# Altium PCB 175-00003, rev 2, Sinistro ASP.PcbDoc (part 3 of 5)
Units mil, origin at the board's own origin, x right, y up, seen from the top; angles counter-clockwise.
Board outline 5905.51 x 4330.71 mil, 8 copper layers (Top Layer (.GTL), MidLayer1 (.G1), +28V and VCC (.GP1), A and D grounds (.GP2), Earth GND (.GP3), +5ANA (.GP4), -5ANA (.GP5), Bottom Layer (.GBL)); 381 components, 275 nets, 1751 pads, 519 vias.
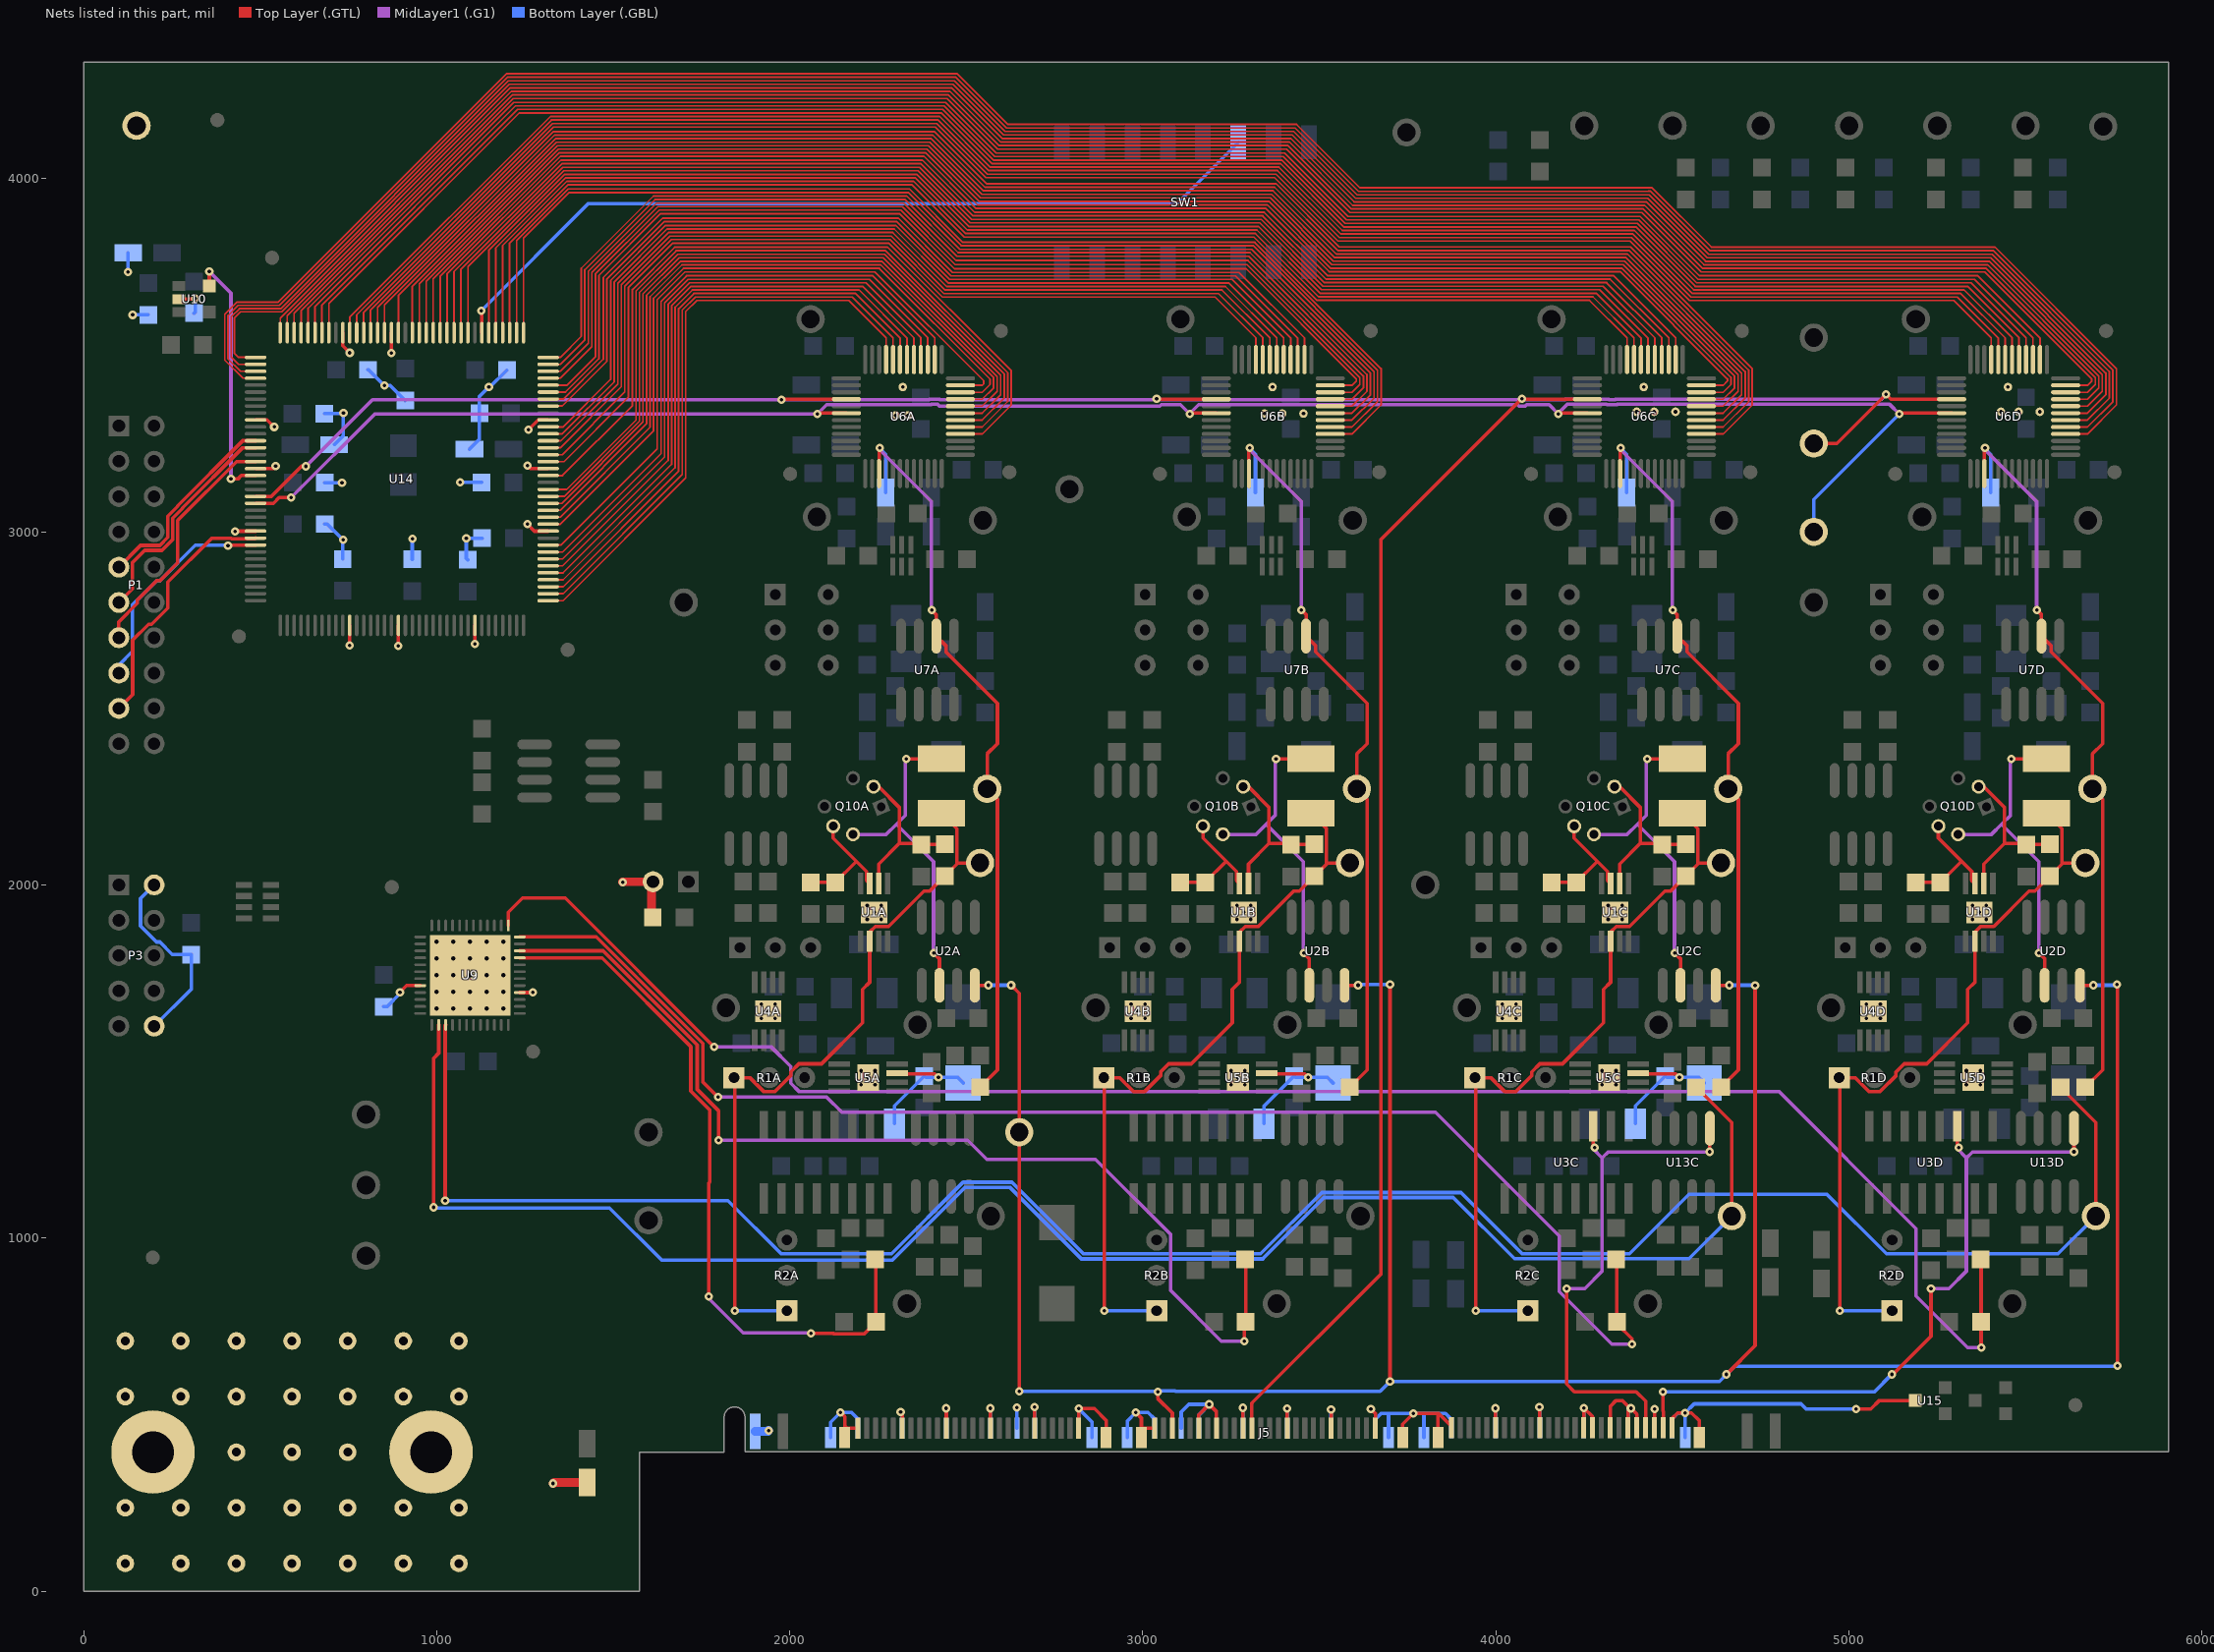
[diagram p9: the nets of this part, all layers, seen from the top]

## Via types
v1: diameter 24, hole 10, Top Layer (.GTL) to Bottom Layer (.GBL), tented both sides, 519 vias

## Nets (pads, with @x,y where several pads share a name; then routed paths per layer and width w, separated by ;. In a path a pad name is that pad's centre, name@x,y a point inside that pad or via, vN(x,y) a via of type N, cw(c..) or ccw(c..) an arc to the next point about the centre after c; other vN are vias at no path point) (continued)
CH3_BIAS_ADJ: R6C.2 TP2C.1 U9.14 | length 5032.3
  Top Layer (.GTL) w10: v1(991,1087) 991,1509 1005.91,1523.91 U9.14@1005.91,1603.74 ; R6C.2@4567.52,1427.32 4667.52,1327.32 TP2C.1@4667.52,1062.32
  Bottom Layer (.GBL) w10: v1(991,1087) 993,1085 1490,1085 1637,938 2290.8,938 2496.8,1144 2623.2,1144 2826.2,941 3340.85,941 ; 3339.52,941.32 3513.2,1115 3879,1115 4052.68,941.32 4546.52,941.32 TP2C.1@4667.52,1062.32
CH3_OUT: J5.7 U3C.3 U13C.1 | length 1514.5
  Top Layer (.GTL) w10: v1(4200.52,857.32) 4200.52,586.48 4222,565 4397,565 4423.91,538.09 J5.7@4423.91,462.85 ; U3C.3@4275.52,1316.68 4275.52,1253.32 4278.1,1255.9 v1(4279.52,1255.9) ; v1(4605.52,1244.32) U13C.1@4605.52,1310.78
  MidLayer1 (.G1) w10: v1@4199.79,857.05 4251.79,857.05 4300.79,906.05 4300.79,1227.05 ; v1@4274.79,1253.05 4300.79,1227.05 ; v1@4604.79,1244.05 4317.79,1244.05 4300.79,1227.05
CH4_BIAS_ADJ: R6D.2 TP2D.1 U9.15 | length 6138.1
  Top Layer (.GTL) w10: v1(1024,1106) 1024,1602.15 U9.15@1025.59,1603.74 ; R6D.2@5599.02,1427.32 5699.02,1327.32 TP2D.1@5699.02,1062.32
  Bottom Layer (.GBL) w10: v1(1024,1106) 1825.26,1106 1975.94,955.32 2288.32,955.32 2491,1158 2629,1158 2831.68,955.32 3333.73,955.32 3507.4,1129 3900.69,1129 4074.37,955.32 4378.32,955.32 4547,1124 4937.18,1124 5105.86,955.32 5592.02,955.32 TP2D.1@5699.02,1062.32
CH4_OUT: J5.3 U3D.3 U13D.1 | length 1986.7
  Top Layer (.GTL) w10: v1(4473,565) 4473,509.81 4473.91,508.91 J5.3@4473.91,462.85 ; v1@5122,612 5232.02,722.02 v1(5232.02,857.32) ; U3D.3@5307.02,1316.68 5307.02,1253.32 5309.6,1255.9 v1(5311.01,1255.9) ; v1(5637.02,1244.32) U13D.1@5637.02,1310.78
  MidLayer1 (.G1) w10: v1@5231.28,857.05 5283.28,857.05 5332.28,906.05 5332.28,1227.05 ; v1@5306.28,1253.05 5332.28,1227.05 ; v1@5636.28,1244.05 5349.28,1244.05 5332.28,1227.05
  Bottom Layer (.GBL) w10: v1(4473,565) 4493,565 5072,565 v1(5121,614)
CLK_100: U10.5 U14.18 | length 731.9
  Top Layer (.GTL) w10: U10.5@356.15,3696.25 v1(356.15,3737.25) ; v1@417.32,3153.54 v1(417.32,3149.61) 437.01,3149.61 446.85,3159.45 U14.18@487.21,3159.45
  MidLayer1 (.G1) w10: v1(356.15,3737.25) 417.32,3676.08 v1(417.32,3149.61)
CLK_ENBL: P1.15 U14.28 | length 630.7
  Top Layer (.GTL) w10: v1(409,2961) 410.6,2962.6 U14.28@487.21,2962.6
  Bottom Layer (.GBL) w10: P1.15@100,2600 100,2622.94 138.53,2661.47 138.53,2793.01 206.99,2861.47 215.96,2861.47 316.49,2962 410,2962 v1(409,2961)
COMMOUTA: C48A.1 R7A.2 TP9A.1 U6A.3 U7A.2 | length 2194.7
  Top Layer (.GTL) w10: U6A.3@2253.2,3164.9 v1@2253.2,3235.42 ; v1(2402.09,2778.32) 2415.09,2765.32 U7A.2@2415.09,2704.78 2442.31,2677.56 2442.31,2659.91 2588.09,2514.13 2588.09,2400.32 2559.09,2371.32 TP9A.1@2559.09,2272.32 2588.09,2243.32 2588.09,1476.32 R7A.2@2539.09,1427.32
  MidLayer1 (.G1) w10: v1@2252.46,3235.16 2401.36,3086.26 v1@2401.36,2778.05
  Bottom Layer (.GBL) w10: v1@2254.36,3237.05 2271.36,3220.05 C48A.1@2271.36,3111.05
  other v1: 2255.09,3237.32
COMMOUTB: C48B.1 R7B.2 TP9B.1 U6B.3 U7B.2 | length 2194.7
  Top Layer (.GTL) w10: U6B.3@3300.44,3164.9 v1@3300.44,3235.42 ; v1(3449.34,2778.32) 3462.34,2765.32 U7B.2@3462.34,2704.78 3489.56,2677.56 3489.56,2659.91 3635.34,2514.13 3635.34,2400.32 3606.34,2371.32 TP9B.1@3606.34,2272.32 3635.34,2243.32 3635.34,1476.32 R7B.2@3586.34,1427.32
  MidLayer1 (.G1) w10: v1@3299.71,3235.16 3448.61,3086.26 v1@3448.61,2778.05
  Bottom Layer (.GBL) w10: v1@3301.61,3237.05 3318.61,3220.05 C48B.1@3318.61,3111.05
  other v1: 3302.34,3237.32
COMMOUTC: C48C.1 R7C.2 TP9C.1 U6C.3 U7C.2 | length 2194.7
  Top Layer (.GTL) w10: U6C.3@4351.62,3164.9 v1@4351.62,3235.42 ; v1(4500.52,2778.32) 4513.52,2765.32 U7C.2@4513.52,2704.78 4540.74,2677.56 4540.74,2659.91 4686.52,2514.13 4686.52,2400.32 4657.52,2371.32 TP9C.1@4657.52,2272.32 4686.52,2243.32 4686.52,1476.32 R7C.2@4637.52,1427.32
  MidLayer1 (.G1) w10: v1@4350.89,3235.16 4499.79,3086.26 v1@4499.79,2778.05
  Bottom Layer (.GBL) w10: v1@4352.79,3237.05 4369.79,3220.05 C48C.1@4369.79,3111.05
  other v1: 4353.52,3237.32
COMMOUTD: C48D.1 R7D.2 TP9D.1 U6D.3 U7D.2 | length 2194.7
  Top Layer (.GTL) w10: U6D.3@5383.12,3164.9 v1@5383.12,3235.42 ; v1(5532.02,2778.32) 5545.02,2765.32 U7D.2@5545.02,2704.78 5572.24,2677.56 5572.24,2659.91 5718.02,2514.13 5718.02,2400.32 5689.02,2371.32 TP9D.1@5689.02,2272.32 5718.02,2243.32 5718.02,1476.32 R7D.2@5669.02,1427.32
  MidLayer1 (.G1) w10: v1@5382.39,3235.16 5531.28,3086.26 v1@5531.28,2778.05
  Bottom Layer (.GBL) w10: v1@5384.28,3237.05 5401.28,3220.05 C48D.1@5401.28,3111.05
  other v1: 5385.02,3237.32
CONVST_N: J5.81 TP26.1 U6A.40 U6B.40 U6C.40 U6D.40 U14.21 | length 8971.7
  Top Layer (.GTL) w10: U14.21@487.21,3100.39 532.39,3100.39 617.5,3185.5 v1(629.5,3185.5) ; v1@1976.68,3375.53 U6A.40@2160.68,3375.53 ; v1@3039,3375.53 U6B.40@3207.92,3375.53 ; J5.81@3308.56,461.79 3308.56,532.56 ; 3309,533 3308.56,532.56 ; 3674,901 3674,898 ; v1@4073,3377 3675,2979 3674,2978 3674,2903 3674,898 ; v1@4074,3375.53 U6C.40@4259.1,3375.53 ; TP26.1@4900,3250 4966,3250 v1(5105,3389) 5118.47,3375.53 U6D.40@5290.6,3375.53 ; 3308.56,532.56 3674,898
  MidLayer1 (.G1) w10: v1(629.5,3185.5) 818.32,3374.32 v1(1976.68,3374.32) 2394.9,3374.32 2395.58,3375 2424.58,3375 2425.25,3374.32 3036.32,3374.32 v1(3039,3377) 3041.68,3374.32 4071.32,3374.32 v1(4074,3377) 4074,3376 4075.68,3374.32 4195.52,3374.32 4196.2,3375 4319.14,3375 4319.82,3374.32 4337.22,3374.32 4337.9,3375 5091,3375 v1(5105,3389)
  Bottom Layer (.GBL) w10: v1@4073,3377 v1(4074,3377)
CS_N: TP23.1 U6A.42 U6B.42 U6C.42 U6D.42 U14.22 | length 5661.4
  Top Layer (.GTL) w10: U14.22@487.92,3080 U14.22@487.21,3080.71 537.71,3080.71 554,3097 v1(588,3097) ; v1@2078,3336.16 U6A.42@2160.68,3336.16 ; v1@3133,3336.16 U6B.42@3207.92,3336.16 ; v1@4177,3336.16 U6C.42@4259.1,3336.16 ; v1(5142,3334) 5142,3336.16 U6D.42@5290.6,3336.16
  MidLayer1 (.G1) w10: v1(588,3097) 825,3334 v1(2078,3334) 2104.32,3360.32 2400.7,3360.32 2401.38,3361 2418.78,3361 2423.78,3356 3047.7,3356 3052.02,3360.32 3106.68,3360.32 v1(3133,3334) 3133,3335 3158.32,3360.32 4060.98,3360.32 4065.3,3356 4082.7,3356 4087.02,3360.32 4150.68,3360.32 v1(4177,3334) 4177,3336 4202,3361 4313.35,3361 4314.02,3360.32 4343.02,3360.32 4343.69,3361 5115,3361 v1(5142,3334)
  Bottom Layer (.GBL) w10: TP23.1@4900,3000 4900,3092 v1(5142,3334)
DAT_STB: P1.9 U14.13 | length 571.5
  Top Layer (.GTL) w10: P1.9@100,2900 161.47,2961.47 215.96,2961.47 238.53,2984.04 238.53,3044.44 266.53,3072.44 266.53,3073.66 450.74,3257.87 U14.13@487.21,3257.87
DB0: U6A.33 U14.73 | length 1690.5
  Top Layer (.GTL) w5: U14.73@1315.95,2805.12 1358.12,2805.12 1705.46,3152.46 1705.46,3623.8 1736.71,3655.05 2167.13,3655.05 2272.88,3549.3 U6A.33@2272.88,3487.74
DB1: U6A.32 U14.74 | length 1707
  Top Layer (.GTL) w5: U14.74@1315.95,2824.8 1358.12,2824.8 1695.46,3162.14 1695.46,3627.94 1732.57,3665.05 2176.81,3665.05 2292.57,3549.3 U6A.32@2292.57,3487.74
DB2: U6A.31 U14.75 | length 1723.6
  Top Layer (.GTL) w5: U14.75@1315.95,2844.49 1349.86,2844.49 1358.12,2844.49 1685.46,3171.83 1685.46,3632.08 1728.43,3675.05 2186.5,3675.05 2312.25,3549.3 U6A.31@2312.25,3487.74
DB3: U6A.30 U14.76 | length 1740.2
  Top Layer (.GTL) w5: U14.76@1315.95,2864.17 1349.86,2864.17 1358.12,2864.17 1675.46,3181.51 1675.46,3636.22 1724.29,3685.05 2196.18,3685.05 2331.94,3549.3 U6A.30@2331.94,3487.74
DB4: U6A.29 U14.77 | length 1756.7
  Top Layer (.GTL) w5: U14.77@1315.95,2883.86 1349.86,2883.86 1358.12,2883.86 1665.46,3191.2 1665.46,3640.37 1720.15,3695.05 2205.87,3695.05 2351.62,3549.3 U6A.29@2351.62,3487.74
DB5: U6A.28 U14.78 | length 1772.5
  Top Layer (.GTL) w5: U14.78@1315.95,2903.54 1349.86,2903.54 1356.7,2903.54 1655.46,3202.3 1655.46,3644.51 1716,3705.05 2215.55,3705.05 2371.31,3549.3 U6A.28@2371.31,3487.74
DB6: U6A.27 U14.79 | length 1789
  Top Layer (.GTL) w5: U14.79@1315.95,2923.23 1349.86,2923.23 1356.7,2923.23 1645.46,3211.99 1645.46,3648.65 1711.86,3715.05 2225.24,3715.05 2390.99,3549.3 U6A.27@2390.99,3487.74
DB7: U6A.26 U14.80 | length 1805.6
  Top Layer (.GTL) w5: U14.80@1315.95,2942.91 1349.86,2942.91 1356.7,2942.91 1635.46,3221.67 1635.46,3652.79 1707.72,3725.05 2234.92,3725.05 2410.68,3549.3 U6A.26@2410.68,3487.74
DB8: U6A.23 U14.81 | length 2005.2
  Top Layer (.GTL) w5: U14.81@1315.95,2962.6 1351.8,2962.6 1624.46,3235.25 1624.46,3657.35 1703.16,3736.05 2241.11,3736.05 2549.61,3427.56 2549.61,3419.44 2545.07,3414.9 U6A.23@2483.51,3414.9
DB9: U6A.22 U14.84 | length 2009.3
  Top Layer (.GTL) w5: U14.84@1315.95,3021.65 1349.86,3021.65 1614.46,3286.25 1614.46,3661.49 1699.06,3746.09 2253.91,3746.09 2253.94,3746.05 2567.36,3432.64 2567.36,3417.51 2545.07,3395.22 U6A.22@2483.51,3395.22
DB10: U6A.21 U14.85 | length 2042.4
  Top Layer (.GTL) w5: U14.85@1315.95,3041.34 1349.86,3041.34 1604.46,3295.94 1604.46,3665.63 1694.91,3756.09 2257.93,3756.09 2257.97,3756.05 2577.36,3436.66 2577.4,3436.63 2577.4,3407.86 2545.07,3375.53 U6A.21@2483.51,3375.53
DB11: U6A.20 U14.86 | length 2074.8
  Top Layer (.GTL) w5: U14.86@1315.95,3061.02 1349.86,3061.02 1594.46,3305.62 1594.46,3669.77 1690.77,3766.09 2260.66,3766.09 2587.4,3439.36 2587.4,3398.17 2545.07,3355.85 U6A.20@2483.51,3355.85
DB12: U6A.19 U14.87 | length 2110.6
  Top Layer (.GTL) w5: U14.87@1315.95,3080.71 1354.26,3080.71 1584.46,3310.91 1584.46,3673.92 1686.59,3776.05 2265.15,3776.05 2597.36,3443.85 2597.36,3388.45 2545.07,3336.16 U6A.19@2483.51,3336.16
DB13: U6A.18 U14.88 | length 2147.7
  Top Layer (.GTL) w5: U14.88@1315.95,3100.39 1361.22,3100.39 1574.46,3313.63 1574.46,3678.06 1682.45,3786.05 2269.12,3786.05 2607.36,3447.82 2607.36,3378.77 2545.07,3316.48 U6A.18@2483.51,3316.48
DB14: U6A.17 U14.89 | length 2184.1
  Top Layer (.GTL) w5: U14.89@1315.95,3120.08 1368.17,3120.08 1564.46,3316.36 1564.46,3682.2 1678.35,3796.09 2271.82,3796.09 2617.4,3450.51 2617.4,3369.12 2545.07,3296.79 U6A.17@2483.51,3296.79
DB15: U6A.16 U14.91 | length 2191.5
  Top Layer (.GTL) w5: U14.91@1315.95,3159.45 1356.45,3159.45 1554.46,3357.46 1554.46,3686.34 1674.17,3806.05 2277.41,3806.05 2627.36,3456.1 2627.36,3359.4 2545.07,3277.11 U6A.16@2483.51,3277.11
DB16: U6B.33 U14.93 | length 2614.8
  Top Layer (.GTL) w5: U14.93@1315.95,3198.82 1360.82,3198.82 1542.95,3380.95 1542.95,3691.11 1669.4,3817.56 2279.42,3817.56 2432.25,3664.72 3204.7,3664.72 3320.13,3549.3 U6B.33@3320.13,3487.74
DB17: U6B.32 U14.94 | length 2628.3
  Top Layer (.GTL) w5: U14.94@1315.95,3218.5 1355.5,3218.5 1532.95,3395.95 1532.95,3695.25 1665.26,3827.56 2283.56,3827.56 2436.39,3674.72 3214.39,3674.72 3339.81,3549.3 U6B.32@3339.81,3487.74
DB18: U6B.31 U14.95 | length 2641.7
  Top Layer (.GTL) w5: U14.95@1315.95,3238.19 1350.19,3238.19 1522.95,3410.95 1522.95,3699.39 1661.12,3837.56 2287.7,3837.56 2440.53,3684.72 3224.07,3684.72 3359.5,3549.3 U6B.31@3359.5,3487.74
DB19: U6B.30 U14.96 | length 2659.3
  Top Layer (.GTL) w5: U14.96@1315.95,3257.87 1351.87,3257.87 1512.95,3418.95 1512.95,3703.53 1656.98,3847.56 2291.84,3847.56 2444.68,3694.72 3233.76,3694.72 3379.18,3549.3 U6B.30@3379.18,3487.74
DB20: U6B.29 U14.97 | length 2678
  Top Layer (.GTL) w5: U14.97@1315.95,3277.56 1355.56,3277.56 1502.95,3424.95 1502.95,3707.68 1652.83,3857.56 2295.98,3857.56 2448.82,3704.72 3243.44,3704.72 3398.87,3549.3 U6B.29@3398.87,3487.74
DB21: U6B.28 U14.98 | length 2696.2
  Top Layer (.GTL) w5: U14.98@1315.95,3297.24 1358.24,3297.24 1492.95,3431.95 1492.95,3711.82 1648.69,3867.56 2300.13,3867.56 2452.96,3714.72 3253.13,3714.72 3418.55,3549.3 U6B.28@3418.55,3487.74
DB22: U6B.27 U14.101 | length 2672.8
  Top Layer (.GTL) w5: U14.101@1315.95,3356.3 1355.3,3356.3 1482.24,3483.24 1482.24,3716.25 1644.26,3878.27 2303.56,3878.27 2457.14,3724.69 2463.94,3724.69 ; U6B.27@3438.24,3487.74 3438.24,3549.3 3262.81,3724.72 2463.97,3724.72 ; 2463.94,3724.69 2463.97,3724.72
DB23: U6B.26 U14.102 | length 2691.5
  Top Layer (.GTL) w5: U14.102@1315.95,3375.98 1358.98,3375.98 1472.24,3489.24 1472.24,3720.4 1640.11,3888.27 2307.7,3888.27 2461.25,3734.72 3272.5,3734.72 3457.92,3549.3 U6B.26@3457.92,3487.74
DB24: U6B.23 U14.103 | length 2914.3
  Top Layer (.GTL) w5: U14.103@1315.95,3395.67 1364.67,3395.67 1459.57,3490.57 1459.57,3725.65 1634.86,3900.94 2310.2,3900.94 2466.27,3744.88 3292.78,3744.88 3604.61,3433.05 3604.61,3427.19 3592.32,3414.9 U6B.23@3530.76,3414.9
DB25: U6B.22 U14.104 | length 2950.2
  Top Layer (.GTL) w5: U14.104@1315.95,3415.35 1369.35,3415.35 1449.57,3495.57 1449.57,3729.79 1630.76,3910.98 2314.31,3910.98 2468.6,3756.69 3295.11,3756.69 3614.64,3437.16 3614.64,3430.36 3614.61,3430.33 3614.61,3429.92 3614.64,3429.89 3614.64,3417.54 3592.32,3395.22 U6B.22@3530.76,3395.22
DB26: U6B.21 U14.105 | length 2971.9
  Top Layer (.GTL) w5: U14.105@1315.95,3435.04 1349.86,3435.04 1439.57,3524.75 1439.57,3733.93 1626.58,3920.94 2318.49,3920.94 2470.93,3768.5 3297.44,3768.5 3624.61,3441.34 3624.61,3407.82 3592.32,3375.53 U6B.21@3530.76,3375.53
DB27: U6B.20 U14.106 | length 3005
  Top Layer (.GTL) w5: U14.106@1315.95,3454.72 1349.86,3454.72 1429.57,3534.43 1429.57,3738.07 1622.44,3930.94 2322.63,3930.94 2473.26,3780.31 3299.77,3780.31 3634.64,3445.45 3634.64,3398.17 3592.32,3355.85 U6B.20@3530.76,3355.85
DB28: U6B.19 U14.107 | length 3038.1
  Top Layer (.GTL) w5: U14.107@1315.95,3474.41 1349.86,3474.41 1419.57,3544.12 1419.57,3742.22 1618.29,3940.94 2326.77,3940.94 2476.91,3790.81 3303.42,3790.81 3644.61,3449.62 3644.61,3388.45 3592.32,3336.16 U6B.19@3530.76,3336.16
DB29: U6B.18 U14.108 | length 3071.3
  Top Layer (.GTL) w5: U14.108@1315.95,3494.09 1349.86,3494.09 1409.57,3553.8 1409.57,3746.36 1614.15,3950.94 2330.91,3950.94 2481.86,3800 3308.37,3800 3654.61,3453.77 3654.61,3378.77 3592.32,3316.48 U6B.18@3530.76,3316.48
DB30: U6B.17 U14.109 | length 3201
  Top Layer (.GTL) w5: U14.109@1246.06,3563.98 1246.06,3832.06 1374.94,3960.94 2335.06,3960.94 2485.39,3810.61 3311.9,3810.61 3664.61,3457.91 3664.61,3369.08 3592.32,3296.79 U6B.17@3530.76,3296.79
DB31: U6B.16 U14.110 | length 3261.1
  Top Layer (.GTL) w5: U14.110@1226.38,3563.98 1226.38,3825.11 1372.22,3970.94 2339.2,3970.94 2490.46,3819.68 3316.97,3819.68 3674.61,3462.05 3674.61,3359.4 3592.32,3277.11 U6B.16@3530.76,3277.11
DB32: U6C.33 U14.111 | length 3727.9
  Top Layer (.GTL) w5: U14.111@1206.69,3563.98 1206.69,3818.15 1371.05,3982.5 2346.74,3982.5 2494.38,3834.87 3314.61,3834.87 3493.79,3655.69 4264.92,3655.69 4371.31,3549.3 U6C.33@4371.31,3487.74
DB33: U6C.32 U14.112 | length 3771.4
  Top Layer (.GTL) w5: U14.112@1187.01,3563.98 1187.01,3811.19 1368.32,3992.5 2350.88,3992.5 2498.52,3844.87 3318.76,3844.87 3497.93,3665.69 4274.6,3665.69 4390.99,3549.3 U6C.32@4390.99,3487.74
DB34: U6C.31 U14.113 | length 3815.1
  Top Layer (.GTL) w5: U14.113@1167.32,3563.98 1167.32,3804.24 1365.59,4002.5 2355.02,4002.5 2502.7,3854.83 2509.49,3854.83 ; U6C.31@4410.68,3487.74 4410.68,3549.3 4284.29,3675.69 3508.94,3675.69 3508.91,3675.66 3502.11,3675.66 3322.9,3854.87 2509.53,3854.87 ; 2509.49,3854.83 2509.53,3854.87
DB35: U6C.30 U14.114 | length 3858.6
  Top Layer (.GTL) w5: U14.114@1147.64,3563.98 1147.64,3797.28 1362.87,4012.5 2359.17,4012.5 2506.8,3864.87 3327.04,3864.87 3506.21,3685.69 4293.97,3685.69 4430.36,3549.3 U6C.30@4430.36,3487.74
DB36: U6C.29 U14.117 | length 3918.5
  Top Layer (.GTL) w5: U14.117@1088.58,3563.98 1088.58,3750.95 1360.17,4022.54 2363.27,4022.54 2363.31,4022.5 2510.94,3874.87 2510.98,3874.9 3331.15,3874.9 3331.18,3874.87 3510.36,3695.69 4303.66,3695.69 4450.05,3549.3 U6C.29@4450.05,3487.74
DB37: U6C.28 U14.118 | length 3962.1
  Top Layer (.GTL) w5: U14.118@1068.9,3563.98 1068.9,3743.99 1357.41,4032.5 2367.45,4032.5 2515.09,3884.87 3335.33,3884.87 3514.5,3705.69 4313.34,3705.69 4469.73,3549.3 U6C.28@4469.73,3487.74
DB38: U6C.27 U14.119 | length 4005.6
  Top Layer (.GTL) w5: U14.119@1049.21,3563.98 1049.21,3737.04 1354.68,4042.5 2371.59,4042.5 2519.23,3894.87 3339.47,3894.87 3518.64,3715.69 4323.03,3715.69 4489.42,3549.3 U6C.27@4489.42,3487.74
DB39: U6C.26 U14.120 | length 4049.2
  Top Layer (.GTL) w5: U14.120@1029.53,3563.98 1029.53,3730.08 1351.95,4052.5 2375.73,4052.5 2523.37,3904.87 3343.61,3904.87 3522.78,3725.69 4332.71,3725.69 4509.1,3549.3 U6C.26@4509.1,3487.74
DB40: U6C.23 U14.121 | length 4292
  Top Layer (.GTL) w5: U14.121@1009.84,3563.98 1009.84,3723.12 1350.23,4063.5 2380.29,4063.5 2527.93,3915.87 3348.17,3915.87 3527.34,3736.69 4352.15,3736.69 4655.79,3433.05 4655.79,3427.19 4643.5,3414.9 U6C.23@4581.94,3414.9
DB41: U6C.22 U14.122 | length 4352.2
  Top Layer (.GTL) w5: U14.122@990.16,3563.98 990.16,3716.16 1347.5,4073.5 2384.43,4073.5 2532.07,3925.87 3352.31,3925.87 3531.48,3746.69 4356.29,3746.69 4665.79,3437.2 4665.79,3417.51 4643.5,3395.22 U6C.22@4581.94,3395.22
DB42: U6C.21 U14.123 | length 4412.3
  Top Layer (.GTL) w5: U14.123@970.47,3563.98 970.47,3709.21 1344.77,4083.5 2388.57,4083.5 2536.21,3935.87 3356.45,3935.87 3535.62,3756.69 4360.43,3756.69 4675.79,3441.34 4675.79,3407.82 4643.5,3375.53 U6C.21@4581.94,3375.53
DB43: U6C.20 U14.124 | length 4472.5
  Top Layer (.GTL) w5: U14.124@950.79,3563.98 950.79,3702.25 1342.04,4093.5 2392.72,4093.5 2540.35,3945.87 3360.59,3945.87 3539.77,3766.69 4364.58,3766.69 4685.79,3445.48 4685.79,3398.14 4643.5,3355.85 U6C.20@4581.94,3355.85
DB44: U6C.19 U14.125 | length 4532.6
  Top Layer (.GTL) w5: U14.125@931.1,3563.98 931.1,3695.29 1339.31,4103.5 2396.86,4103.5 2544.5,3955.87 3364.73,3955.87 3543.91,3776.69 4368.72,3776.69 4695.79,3449.62 4695.79,3388.45 4643.5,3336.16 U6C.19@4581.94,3336.16
DB45: U6C.18 U14.127 | length 4600.9
  Top Layer (.GTL) w5: U14.127@891.73,3563.98 891.73,3668.65 1336.59,4113.5 2401,4113.5 2548.64,3965.87 3368.88,3965.87 3548.05,3786.69 4372.86,3786.69 4705.79,3453.77 4705.79,3378.77 4643.5,3316.48 U6C.18@4581.94,3316.48
DB46: U6C.17 U14.129 | length 4669.3
  Top Layer (.GTL) w5: U14.129@852.36,3563.98 852.36,3642.2 1333.66,4123.5 2405.14,4123.5 2552.78,3975.87 3373.02,3975.87 3552.19,3796.69 4377,3796.69 4715.79,3457.91 4715.79,3369.08 4643.5,3296.79 U6C.17@4581.94,3296.79
DB47: U6C.16 U14.130 | length 4729.5
  Top Layer (.GTL) w5: U14.130@832.68,3563.98 832.68,3635.25 1330.93,4133.5 2409.28,4133.5 2556.92,3985.87 3377.16,3985.87 3556.33,3806.69 4381.14,3806.69 4725.79,3462.05 4725.79,3359.4 4643.5,3277.11 U6C.16@4581.94,3277.11
DB48: U6D.33 U14.131 | length 5177.5
  Top Layer (.GTL) w5: U14.131@812.99,3563.98 812.99,3628.29 1330.91,4146.2 2412.28,4146.2 2555.65,4002.83 3373.04,4002.83 3552.5,3823.37 4379.39,3823.37 4547.71,3655.05 5297.05,3655.05 5402.8,3549.3 U6D.33@5402.8,3487.74
DB49: U6D.32 U14.132 | length 5221.3
  Top Layer (.GTL) w5: U14.132@793.31,3563.98 793.31,3621.69 1327.82,4156.2 2416.42,4156.2 2559.79,4012.83 3377.18,4012.83 3556.64,3833.37 4383.53,3833.37 4551.85,3665.05 5306.74,3665.05 5422.49,3549.3 U6D.32@5422.49,3487.74
DB50: U6D.31 U14.133 | length 5264.8
  Top Layer (.GTL) w5: U14.133@773.62,3563.98 773.62,3614.74 1325.09,4166.2 2420.56,4166.2 2563.93,4022.83 3381.32,4022.83 3560.78,3843.37 4387.68,3843.37 4555.99,3675.05 5316.42,3675.05 5442.17,3549.3 U6D.31@5442.17,3487.74
DB51: U6D.30 U14.134 | length 5308.4
  Top Layer (.GTL) w5: U14.134@753.94,3563.98 753.94,3607.78 1322.36,4176.2 2424.71,4176.2 2568.11,4032.8 2574.91,4032.8 2574.95,4032.83 3385.46,4032.83 3564.93,3853.37 4391.82,3853.37 4560.13,3685.05 5326.11,3685.05 5461.86,3549.3 U6D.30@5461.86,3487.74
DB52: U6D.29 U14.137 | length 5418.3
  Top Layer (.GTL) w5: U14.137@694.88,3563.98 694.88,3646.88 1234.2,4186.2 2428.85,4186.2 2572.22,4042.83 3389.6,4042.83 3569.07,3863.37 4395.96,3863.37 4564.28,3695.05 5335.79,3695.05 5481.54,3549.3 U6D.29@5481.54,3487.74
DB53: U6D.28 U14.138 | length 5463.3
  Top Layer (.GTL) w5: U14.138@675.2,3563.98 675.2,3642.2 1229.24,4196.24 2432.96,4196.24 2576.36,4052.83 3393.75,4052.83 3573.21,3873.37 4400.1,3873.37 4568.42,3705.05 5333.06,3705.05 5333.1,3705.09 5345.44,3705.09 5501.23,3549.3 U6D.28@5501.23,3487.74
DB54: U6D.27 U14.139 | length 5508.7
  Top Layer (.GTL) w5: U14.139@655.51,3563.98 655.51,3638.51 1223.2,4206.2 2437.13,4206.2 2580.5,4062.83 3397.89,4062.83 3577.35,3883.37 4404.24,3883.37 4572.56,3715.05 5355.16,3715.05 5520.91,3549.3 U6D.27@5520.91,3487.74
DB55: U6D.26 U14.140 | length 5553.4
  Top Layer (.GTL) w5: U14.140@635.83,3563.98 635.83,3633.37 1218.66,4216.2 2441.28,4216.2 2584.65,4072.83 3402.03,4072.83 3581.49,3893.37 4408.39,3893.37 4576.7,3725.05 5352.43,3725.05 5352.47,3725.09 5364.81,3725.09 5540.6,3549.3 U6D.26@5540.6,3487.74
DB56: U6D.23 U14.141 | length 5796.2
  Top Layer (.GTL) w5: U14.141@616.14,3563.98 616.14,3626.41 1216.93,4227.2 2445.83,4227.2 2589.2,4083.83 3406.59,4083.83 3586.09,3904.34 3592.89,3904.34 ; U6D.23@5613.43,3414.9 5674.99,3414.9 5687.28,3427.19 5687.28,3433.05 5384.28,3736.05 4588.13,3736.05 4588.09,3736.02 4581.29,3736.02 4412.94,3904.37 3592.92,3904.37 ; 3592.89,3904.34 3592.92,3904.37
DB57: U6D.22 U14.142 | length 5856.4
  Top Layer (.GTL) w5: U14.142@596.46,3563.98 596.46,3619.46 1214.2,4237.2 2449.97,4237.2 2593.34,4093.83 3410.73,4093.83 3590.19,3914.37 ; U6D.22@5613.43,3395.22 5674.99,3395.22 5697.28,3417.51 5697.28,3437.2 5388.43,3746.05 4585.4,3746.05 4417.09,3914.37 4417.05,3914.34 3590.23,3914.34 ; 3590.19,3914.37 3590.23,3914.34
DB58: U6D.21 U14.143 | length 5916.7
  Top Layer (.GTL) w5: U14.143@576.77,3563.98 576.77,3612.5 1211.55,4247.28 1298.63,4247.28 1298.71,4247.2 1612.2,4247.2 2454.12,4247.2 2597.49,4103.83 3408,4103.83 3408.04,4103.87 3414.83,4103.87 ; U6D.21@5613.43,3375.53 5674.99,3375.53 5707.28,3407.82 5707.28,3441.34 5392.57,3756.05 4596.41,3756.05 4596.38,3756.02 4589.58,3756.02 4589.54,3756.05 4421.23,3924.37 4421.19,3924.41 4414.39,3924.41 4414.32,3924.34 3594.37,3924.34 ; 3414.87,4103.83 3594.34,3924.37 ; 3414.83,4103.87 3414.87,4103.83 ; 3594.34,3924.37 3594.37,3924.34
DB59: U6D.20 U14.144 | length 5976.7
  Top Layer (.GTL) w5: U14.144@557.09,3563.98 557.09,3605.54 1208.75,4257.2 2458.26,4257.2 2601.63,4113.83 3412.14,4113.83 ; U6D.20@5613.43,3355.85 5674.99,3355.85 5717.28,3398.14 5717.28,3445.48 5396.71,3766.05 4600.55,3766.05 4600.52,3766.02 4593.72,3766.02 4593.68,3766.05 4425.37,3934.37 3598.48,3934.37 3419.01,4113.83 3418.98,4113.87 3412.18,4113.87 ; 3412.14,4113.83 3412.18,4113.87
DB60: U6D.19 U14.1 | length 6274.1
  Top Layer (.GTL) w5: U14.1@487.21,3494.09 438.91,3494.09 427,3506 427,3605 445,3623 561.82,3623 1206.02,4267.2 2462.4,4267.2 2605.77,4123.83 3416.28,4123.83 ; U6D.19@5613.43,3336.16 5674.99,3336.16 5727.28,3388.45 5727.28,3449.62 5400.85,3776.05 4604.7,3776.05 4604.66,3776.02 4597.86,3776.02 4597.83,3776.05 4429.51,3944.37 4429.48,3944.41 4422.68,3944.41 4422.64,3944.37 3602.62,3944.37 3423.12,4123.87 3416.32,4123.87 ; 3416.28,4123.83 3416.32,4123.87
DB61: U6D.18 U14.2 | length 6353.4
  Top Layer (.GTL) w5: U14.2@487.21,3474.41 438.59,3474.41 418,3495 418,3608.73 441.27,3632 558.09,3632 1203.29,4277.2 2466.54,4277.2 2609.91,4133.83 3427.3,4133.83 3606.76,3954.37 4426.78,3954.37 4426.82,3954.41 4433.62,3954.41 4433.65,3954.37 4601.97,3786.05 4602,3786.02 5404.96,3786.02 5404.99,3786.05 5737.28,3453.77 5737.28,3378.77 5674.99,3316.48 U6D.18@5613.43,3316.48
DB62: U6D.17 U14.3 | length 6429.2
  Top Layer (.GTL) w5: U14.3@487.21,3454.72 444.28,3454.72 409,3490 409,3612.46 437.54,3641 554.36,3641 1200.57,4287.2 2470.68,4287.2 2614.05,4143.83 3431.44,4143.83 3610.9,3964.37 4430.93,3964.37 4430.96,3964.41 4437.76,3964.41 4437.8,3964.37 4606.11,3796.05 5409.14,3796.05 5747.28,3457.91 5747.28,3369.08 5674.99,3296.79 U6D.17@5613.43,3296.79
DB63: U6D.16 U14.4 | length 6504.4
  Top Layer (.GTL) w5: U14.4@487.21,3435.04 450.96,3435.04 400,3486 400,3616.18 433.82,3650 550.63,3650 1197.84,4297.2 2474.83,4297.2 2618.2,4153.83 3435.58,4153.83 3615.05,3974.37 4435.07,3974.37 4435.1,3974.41 4441.9,3974.41 4441.94,3974.37 4610.25,3806.05 5413.28,3806.05 5757.28,3462.05 5757.28,3359.4 5674.99,3277.11 U6D.16@5613.43,3277.11
DC_HOLD: J5.99 TP22.1 U2A.8 U2B.8 U2C.8 U2D.8 | length 8209.3
  Top Layer (.GTL) w10: U2A.8@2524.09,1715.87 2562.17,1715.87 v1(2562.36,1716.05) ; v1(2627,1716.05) 2650,1693.05 TP22.1@2650,1300 v1(2650,566) ; v1(3042,565) 3042,546 3083.56,504.44 J5.99@3083.56,461.79 ; U2B.8@3571.34,1715.87 v1@3609.42,1715.87 ; v1(3700,594) v1(3700,1718) ; U2C.8@4622.52,1715.87 4660.6,1715.87 v1(4660.79,1716.05) ; v1(4653,614) 4734,695 v1(4734,1715) ; U2D.8@5654.02,1715.87 5692.09,1715.87 v1(5692.28,1716.05) ; v1(5759,1718) 5760,1717 v1(5760,638)
  Bottom Layer (.GBL) w10: v1(2562.36,1716.05) v1(2627,1716.05) ; v1(2650,566) 3041,566 v1(3042,565) 3044,567 3091.7,567 3092.7,566 3672,566 v1(3700,594) 4633,594 v1(4653,614) 4676,637 5759,637 v1(5760,638) ; v1(3609.61,1716.05) 3611.55,1718 v1(3700,1718) ; v1(4660.79,1716.05) v1@4734,1716.05 ; v1(5692.28,1716.05) v1@5759,1716.05
DFF_ENBL: P1.17 U14.27 | length 722.2
  Top Layer (.GTL) w10: P1.17@100,2500 139,2539 139,2693.49 184.04,2738.53 193.01,2738.53 238.53,2784.04 238.53,2857.53 363,2982 417.7,2982 419.7,2980 484.92,2980 U14.27@487.21,2982.28
E: pad.0 pad.1 pad.2 pad.3 pad.4 pad.5 U1A.0 U1B.0 U1C.0 U1D.0 U4A.0 U4B.0 U4C.0 U4D.0 U5A.0 U5B.0 U5C.0 U5D.0 U9.0
END: P1.13 U14.16 | length 696.2
  Top Layer (.GTL) w10: P1.13@100,2700 100,2745.51 152.53,2798.04 152.53,2807.01 206.99,2861.47 215.96,2861.47 266.53,2912.04 266.53,3032.26 433.09,3198.82 U14.16@487.21,3198.82
GND: C2.1 C27.1 C32.2 C33.1 C34.1 C36.1 C37.1 C38.1 C39.1 C40.1 C41.1 C42.1 C43.1 C44.2 C45.2 C47.1 C50.1 C51.1 C52.1 C55.2 C56.2 J5.1 J5.2 J5.5 J5.9 J5.11 J5.12 J5.15 J5.19 J5.21 J5.22 J5.31 J5.32 J5.41 J5.42 J5.51 J5.52 J5.53 J5.54 J5.63 J5.64 J5.73 J5.74 J5.83 J5.84 J5.89 J5.93 J5.94 J5.98 J5.103 J5.104 J5.105 J5.106 J5.115 J5.116 J5.120 J5.125 J5.126 J5.135 J5.136 J5.145 J5.146 J5.155 J5.156 J5.157 J5.158 J5.159 J5.160 J5.161 J5.162 J5.163 J5.164 J5.165 J5.166 J5.167 J5.168 J5.PC08 P2.2 P3.2 P3.10 SW1.14 TP18.1 U9.8 U9.28 U10.2 U14.10 U14.17 U14.26 U14.47 U14.54 U14.65 U14.83 U14.92 U14.99 U14.115 U14.128 U14.135 U15.3 | length 9889.6
  Top Layer (.GTL) w10: U10.2@270.15,3659.25 315.15,3659.25 v1(316.15,3660.25) ; v1(429,3001) 429.97,3001.97 U14.26@487.21,3001.97 ; U14.17@487.21,3179.13 537.13,3179.13 v1(544,3186) ; U14.10@487.21,3316.93 520.07,3316.93 v1(540,3297) ; U14.135@734.25,3563.98 734.25,3526.75 v1(754,3507) ; v1(753,2678) 753.94,2678.94 U14.47@753.94,2735.24 ; v1(872,3506) 872.05,3506.05 U14.128@872.05,3563.98 ; v1(891,2677) 891.73,2677.73 U14.54@891.73,2735.24 ; v1(896,1696) 896.3,1696 915.3,1715 953.7,1715 U9.8@953.74,1714.96 ; v1(1108,2683) 1108.27,2683.27 U14.65@1108.27,2735.24 ; v1(1126,3626) 1127.95,3624.05 U14.115@1127.95,3563.98 ; U9.28@1235.24,1695.28 1271.28,1695.28 v1(1272,1696) ; v1(1257,3021.94) 1276.97,3001.97 U14.83@1315.95,3001.97 ; v1(1257,3188) 1265.87,3179.13 U14.92@1315.95,3179.13 ; v1(1260,3289) 1287.93,3316.93 U14.99@1315.95,3316.93 ; v1(2144,506) 2155.91,494.09 2155.91,468.5 ; J5.167@2155.91,434.79 2155.91,468.5 ; J5.155@2193.41,461.79 2162.62,461.79 2155.91,468.5 ; v1(2314,508) 2318.41,503.59 J5.145@2318.41,461.79 ; v1(2443,518) 2443.41,517.59 J5.135@2443.41,461.79 ; v1(2568,518) 2568.41,517.59 J5.125@2568.41,461.79 ; J5.115@2693.41,461.79 v1(2693.41,521.41) ; J5.105@2818.41,461.79 2818.41,516.59 v1(2818,517) 2863,517 2895.91,484.09 J5.165@2895.91,434.79 ; v1(2980,506) 2995.91,490.09 J5.163@2995.91,464.57 ; J5.163@2995.91,434.79 J5.163@2995.91,464.57 ; J5.103@3033.56,461.79 2998.68,461.79 J5.163@2995.91,464.57 ; J5.93@3158.56,461.79 3158.56,499.56 v1(3188,529) 3208.56,508.44 J5.89@3208.56,461.79 ; J5.83@3283.56,461.79 v1(3283.56,519.44) ; v1(3408,517) 3408.56,516.44 J5.73@3408.56,461.79 ; v1(3533,514) 3533.56,513.44 J5.63@3533.56,461.79 ; v1(3645.67,515.75) 3658.56,502.85 J5.53@3658.56,461.79 ; J5.161@3735.91,434.79 3735.91,472.91 v1(3766,503) 3838,503 ; J5.159@3835.91,434.79 3835.91,500.91 3838,503 ; J5.51@3873.91,462.85 3873.91,467.09 3838,503 ; J5.41@3999,462.94 v1(3999,518) ; v1(4123,521) 4123.91,520.09 J5.31@4123.91,462.85 ; J5.21@4249,462.94 v1(4249,519) 4273.91,494.09 J5.19@4273.91,462.85 ; J5.15@4323.91,462.85 4323.91,523.61 4340.3,540 4357.7,540 4379.7,518 v1(4382,518) ; J5.11@4373.91,462.85 4373.91,509.91 v1(4382,518) ; J5.9@4398.91,462.85 4398.91,501.09 v1(4382,518) ; v1(4448.82,515.75) v1(4448.82,515.75) J5.5@4448.91,462.85 ; J5.1@4498.91,462.85 4498.91,488.91 4515,505 v1(4536,505) 4554,505 4575.91,483.09 J5.157@4575.91,434.79 ; v1(5020,516) 5062,516 5086,540 U15.3@5187,540
  Top Layer (.GTL) w25: v1(1330,305) 1333,308 C55.2@1426,308 ; v1(1527,2008) 1528,2009 1608,2009 C56.2@1608,1912
  Bottom Layer (.GBL) w5: v1@735,3335 v1(736,3336)
  Bottom Layer (.GBL) w10: v1(125.98,3736.22) C32.2@126,3790 ; v1(139.15,3614.25) C27.1@183.15,3614.25 ; P3.10@200,1600 305,1705 C33.1@305,1803 251.49,1803 215.96,1838.53 206.99,1838.53 161.47,1884.04 161.47,1961.47 P3.2@200,2000 ; C2.1@313.15,3619.25 316.15,3622.25 v1(316.15,3660.25) ; C37.1@682,3335 735,3335 735,3272 C45.2@710,3247 ; C38.1@683,3022 690,3022 v1(735,2977) 734,2976 C47.1@734,2923 ; C40.1@683,3139 v1(732,3139) ; C39.1@805,3459 807,3459 v1(852,3414) 869,3414 C41.1@911,3372 ; C36.1@850,1655 859,1655 900,1696 v1(896,1696) ; C42.1@931,2922 931,2979 v1(932,2980) ; v1(1067,3140) C43.1@1127,3140 ; C51.1@1088,2921 1084,2925 v1(1084,2982) C50.1@1129,2982 ; C44.2@1093,3234 1121,3262 C34.1@1121,3336 1121,3383 v1(1148,3410) 1151,3410 C52.1@1199,3458 ; v1(1126,3626) 1429.13,3929.13 3096.73,3929.13 SW1.14@3270.46,4102.87 ; J5.168@2115.91,434.79 2115.91,477.91 v1(2144,506) 2175,506 2193.41,487.59 J5.156@2193.41,461.79 ; v1(2314,508) 2318.41,503.59 J5.146@2318.41,461.79 ; v1(2443,518) 2443.41,517.59 J5.136@2443.41,461.79 ; v1(2568,518) 2568.41,517.59 J5.126@2568.41,461.79 ; v1(2643,520) 2643.41,519.59 J5.120@2643.41,461.79 ; J5.116@2693.41,461.79 v1(2693.41,521.41) ; v1(2818,517) v1@2818.41,516.59 ; J5.106@2818.41,461.79 v1@2818.41,516.59 ; J5.166@2855.91,434.79 2855.91,479.09 v1@2818.41,516.59 ; J5.164@2955.91,434.79 2955.91,481.91 v1(2980,506) 3015,506 3033.56,487.44 J5.104@3033.56,461.79 ; J5.98@3108.56,461.79 3108.56,507.56 3130,529 v1(3188,529) 3189,529 3158.56,498.56 J5.94@3158.56,461.79 ; J5.84@3283.56,461.79 v1(3283.56,519.44) ; v1(3408,517) 3408.56,516.44 J5.74@3408.56,461.79 ; v1(3533,514) 3533,462.35 J5.64@3533.56,461.79 ; J5.54@3658.56,461.79 3658.56,486.56 3675,503 3696,503 ; J5.162@3695.91,434.79 3695.91,502.91 3696,503 ; J5.160@3795.91,434.79 3795.91,502.09 ; J5.52@3873.91,462.85 3873.91,486.09 3857,503 v1(3766,503) 3696,503 ; J5.42@3998.91,462.85 3998.91,517.91 v1(3999,518) ; v1(4123,521) 4123.91,520.09 J5.32@4123.91,462.85 ; J5.22@4248.91,462.85 4248.91,518.91 v1(4249,519) ; J5.12@4373.91,462.85 4373.91,509.91 v1(4382,518) ; J5.2@4498.91,462.85 4498.91,487.91 4515.91,504.91 v1@4535.91,504.91 ; J5.158@4535.91,434.79 v1@4535.91,504.91 ; v1(5020,516) 4878.41,516 4863.91,530.5 4561.5,530.5 v1(4536,505) v1@4535.91,504.91
  Bottom Layer (.GBL) w25: J5.PC08@1902.01,452.85 1937.85,452.85 v1(1940,455)
  other v1: 2643,520
MON_CCD1: R10A.1 R11A.2 U9.33 | length 2036.7
  Top Layer (.GTL) w10: U9.33@1235.24,1793.7 1468.3,1793.7 1720,1542 1720,1416 1773,1363 1773,1158.26 1771,1156.26 v1(1771,835) ; v1(2060,730) 2123.69,730 2125.37,728.32 2210.09,728.32 R11A.2@2244.09,762.32 ; R10A.1@2240.09,939.32 R10A.1@2242.09,937.32 ; R10A.1@2242.09,939.32 R10A.1@2242.09,937.32 ; R11A.2@2244.09,760 2244.09,935.32 R10A.1@2242.09,937.32
  MidLayer1 (.G1) w10: v1(1771,835) 1771,829 1868,732 2058,732 v1(2060,730)
MON_CCD2: R10B.1 R11B.2 U9.34 | length 2962.4
  Top Layer (.GTL) w10: U9.34@1235.24,1813.39 1471.82,1813.39 1738,1547.2 1738,1421 1798,1361 v1(1798,1276.9) ; v1(3287,708) 3287,757.98 R11B.2@3291.34,762.32 3291.34,935.32 R10B.1@3289.34,937.32 ; R10B.1@3287.34,939.32 R10B.1@3289.34,937.32 ; R10B.1@3289.34,939.32 R10B.1@3289.34,937.32
  MidLayer1 (.G1) w10: v1(1798,1276.9) 2504.21,1276.9 2558.3,1222.82 2866,1222.82 3078.34,1010.48 3078.34,852 3222.34,708 v1(3287,708)
MON_CCD3: R10C.1 R11C.2 U9.36 | length 4043.6
  Top Layer (.GTL) w10: U9.36@1235.24,1852.76 1452.24,1852.76 1754,1551 1754,1442 v1(1797,1399) ; R10C.1@4338.52,939.32 R10C.1@4340.52,937.32 ; R10C.1@4340.52,939.32 R10C.1@4340.52,937.32 ; v1(4385,700) 4385,715 4342.52,757.48 R11C.2@4342.52,762.32 4342.52,935.32 R10C.1@4340.52,937.32
  MidLayer1 (.G1) w10: v1(1797,1399) 2104.72,1399 2147.4,1356.32 3828.82,1356.32 4179.52,1005.62 4179.52,848.62 4328.14,700 v1(4385,700)
MON_CCD4: R10D.1 R11D.2 U9.37 | length 5146.8
  Top Layer (.GTL) w10: U9.37@1202.76,1885.24 1202.76,1922.76 1243,1963 1364,1963 v1(1786,1541) ; R10D.1@5370.02,939.32 R10D.1@5372.02,937.32 ; R10D.1@5372.02,939.32 R10D.1@5372.02,937.32 ; v1(5375,690) 5374.02,690.98 R11D.2@5374.02,762.32 5374.02,935.32 R10D.1@5372.02,937.32
  MidLayer1 (.G1) w10: v1(1786,1541) 1948.12,1541 2003.09,1486.02 2003.09,1438.17 2025.94,1415.32 4801.32,1415.32 5190,1026.64 5190,836 5336,690 v1(5375,690)
MUX: P1.11 U14.14 | length 648.3
  Top Layer (.GTL) w10: P1.11@100,2800 138.53,2838.53 138.53,2912.81 173.19,2947.47 221.76,2947.47 252.53,2978.24 252.53,3038.64 280.53,3066.64 280.53,3067.86 450.86,3238.19 U14.14@487.21,3238.19
NetC1A_1: C1A.1 C6A.2 R1A.1 R2A.1 TP1A.1 U1A.6 | length 2092.7
  Top Layer (.GTL) w10: v1(1844.09,794.32) 1844.09,1452.32 R1A.1@1842.09,1454.32 1886.94,1454.32 1925.94,1415.32 1958.25,1415.32 2003.09,1460.17 2003.09,1470.48 2025.94,1493.32 2089.9,1493.32 2206.09,1609.51 2206.09,1704.02 2226.3,1724.23 U1A.6@2226.3,1840.63 2226.3,1866.15 2242.56,1882.42 2280.03,1882.42 2379.93,1982.32 2396.09,1982.32 C1A.1@2439.09,2025.32 2473.09,2059.32 2473.09,2159.55 C6A.2@2429.09,2203.55 ; 2476.09,2062.32 TP1A.1@2539.09,2062.32
  Bottom Layer (.GBL) w10: v1@1843.36,794.05 R2A.1@1991.36,794.05
NetC1A_2: C1A.2 Q10A.2 R3A.2 U1A.2 | length 467.1
  Top Layer (.GTL) w10: Q10A.2@2237.09,2278.32 2251.78,2278.32 2310.09,2220.01 2310.09,2117.32 ; U1A.2@2251.89,2004.01 2251.89,2059.12 2310.09,2117.32 ; C1A.2@2439.09,2115.32 2361.09,2115.32 2359.09,2117.32 2310.09,2117.32
NetC1B_1: C1B.1 C6B.2 R1B.1 R2B.1 TP1B.1 U1B.6 | length 2092.7
  Top Layer (.GTL) w10: v1(2891.34,794.32) 2891.34,1452.32 R1B.1@2889.34,1454.32 2934.18,1454.32 2973.18,1415.32 3005.49,1415.32 3050.34,1460.17 3050.34,1470.48 3073.18,1493.32 3137.15,1493.32 3253.34,1609.51 3253.34,1704.02 3273.54,1724.23 U1B.6@3273.54,1840.63 3273.54,1866.15 3289.81,1882.42 3327.27,1882.42 3427.18,1982.32 3443.34,1982.32 C1B.1@3486.34,2025.32 3520.34,2059.32 3520.34,2159.55 C6B.2@3476.34,2203.55 ; 3523.34,2062.32 TP1B.1@3586.34,2062.32
  Bottom Layer (.GBL) w10: v1@2890.61,794.05 R2B.1@3038.61,794.05
NetC1B_2: C1B.2 Q10B.2 R3B.2 U1B.2 | length 467.1
  Top Layer (.GTL) w10: Q10B.2@3284.34,2278.32 3299.02,2278.32 3357.34,2220.01 3357.34,2117.32 ; U1B.2@3299.13,2004.01 3299.13,2059.12 3357.34,2117.32 ; C1B.2@3486.34,2115.32 3408.34,2115.32 3406.34,2117.32 3357.34,2117.32
NetC1C_1: C1C.1 C6C.2 R1C.1 R2C.1 TP1C.1 U1C.6 | length 2092.7
  Top Layer (.GTL) w10: v1(3942.52,794.32) 3942.52,1452.32 R1C.1@3940.52,1454.32 3985.37,1454.32 4024.37,1415.32 4056.67,1415.32 4101.52,1460.17 4101.52,1470.48 4124.37,1493.32 4188.33,1493.32 4304.52,1609.51 4304.52,1704.02 4324.72,1724.23 U1C.6@4324.72,1840.63 4324.72,1866.15 4340.99,1882.42 4378.45,1882.42 4478.36,1982.32 4494.52,1982.32 C1C.1@4537.52,2025.32 4571.52,2059.32 4571.52,2159.55 C6C.2@4527.52,2203.55 ; 4574.52,2062.32 TP1C.1@4637.52,2062.32
  Bottom Layer (.GBL) w10: v1@3941.79,794.05 R2C.1@4089.79,794.05
NetC1C_2: C1C.2 Q10C.2 R3C.2 U1C.2 | length 467.1
  Top Layer (.GTL) w10: Q10C.2@4335.52,2278.32 4350.2,2278.32 4408.52,2220.01 4408.52,2117.32 ; U1C.2@4350.31,2004.01 4350.31,2059.12 4408.52,2117.32 ; C1C.2@4537.52,2115.32 4459.52,2115.32 4457.52,2117.32 4408.52,2117.32
NetC1D_1: C1D.1 C6D.2 R1D.1 R2D.1 TP1D.1 U1D.6 | length 2092.7
  Top Layer (.GTL) w10: v1(4974.02,794.32) 4974.02,1452.32 R1D.1@4972.02,1454.32 5016.86,1454.32 5055.86,1415.32 5088.17,1415.32 5133.02,1460.17 5133.02,1470.48 5155.86,1493.32 5219.82,1493.32 5336.02,1609.51 5336.02,1704.02 5356.22,1724.23 U1D.6@5356.22,1840.63 5356.22,1866.15 5372.48,1882.42 5409.95,1882.42 5509.85,1982.32 5526.02,1982.32 C1D.1@5569.02,2025.32 5603.02,2059.32 5603.02,2159.55 C6D.2@5559.02,2203.55 ; 5606.02,2062.32 TP1D.1@5669.02,2062.32
  Bottom Layer (.GBL) w10: v1@4973.28,794.05 R2D.1@5121.28,794.05
NetC1D_2: C1D.2 Q10D.2 R3D.2 U1D.2 | length 467.1
  Top Layer (.GTL) w10: Q10D.2@5367.02,2278.32 5381.7,2278.32 5440.02,2220.01 5440.02,2117.32 ; U1D.2@5381.81,2004.01 5381.81,2059.12 5440.02,2117.32 ; C1D.2@5569.02,2115.32 5491.02,2115.32 5489.02,2117.32 5440.02,2117.32
NetC6A_1: C6A.1 Q10A.7 U2A.6 | length 935.4
  Top Layer (.GTL) w10: v1(2329.87,2357.09) C6A.1@2429.09,2357.09 ; v1(2408.09,1807.32) 2424.09,1791.32 U2A.6@2424.09,1715.87
  MidLayer1 (.G1) w10: Q10A.7@2179.09,2143.32 2179.36,2143.05 2273.36,2143.05 2302.04,2171.74 ; v1@2327.36,2356.05 2327.36,2197.05 2302.04,2171.74 ; v1@2407.36,1807.05 2407.36,2066.42 2302.04,2171.74
NetC6B_1: C6B.1 Q10B.7 U2B.6 | length 935.4
  Top Layer (.GTL) w10: v1(3377.11,2357.09) C6B.1@3476.34,2357.09 ; v1(3455.34,1807.32) 3471.34,1791.32 U2B.6@3471.34,1715.87
  MidLayer1 (.G1) w10: Q10B.7@3226.34,2143.32 3226.61,2143.05 3320.61,2143.05 3349.29,2171.74 ; v1@3374.61,2356.05 3374.61,2197.05 3349.29,2171.74 ; v1@3454.61,1807.05 3454.61,2066.42 3349.29,2171.74
NetC6C_1: C6C.1 Q10C.7 U2C.6 | length 935.4
  Top Layer (.GTL) w10: v1(4428.29,2357.09) C6C.1@4527.52,2357.09 ; v1(4506.52,1807.32) 4522.52,1791.32 U2C.6@4522.52,1715.87
  MidLayer1 (.G1) w10: Q10C.7@4277.52,2143.32 4277.79,2143.05 4371.79,2143.05 4400.47,2171.74 ; v1@4425.79,2356.05 4425.79,2197.05 4400.47,2171.74 ; v1@4505.79,1807.05 4505.79,2066.42 4400.47,2171.74
NetC6D_1: C6D.1 Q10D.7 U2D.6 | length 935.4
  Top Layer (.GTL) w10: v1(5459.79,2357.09) C6D.1@5559.02,2357.09 ; v1(5538.02,1807.32) 5554.02,1791.32 U2D.6@5554.02,1715.87
  MidLayer1 (.G1) w10: Q10D.7@5309.02,2143.32 5309.28,2143.05 5403.28,2143.05 5431.96,2171.74 ; v1@5457.28,2356.05 5457.28,2197.05 5431.96,2171.74 ; v1@5537.28,1807.05 5537.28,2066.42 5431.96,2171.74
NetC8A_2: C8A.2 Q10A.6 R4A.2 U1A.3 | length 360
  Top Layer (.GTL) w10: C8A.2@2059.09,2007.32 R4A.2@2129.09,2007.32 2187.96,2066.18 2189.65,2066.18 ; Q10A.6@2123.09,2166.32 2123.09,2132.74 2189.65,2066.18 ; U1A.3@2226.3,2004.01 2217.58,2012.73 2217.58,2038.25 2189.65,2066.18
NetC8B_2: C8B.2 Q10B.6 R4B.2 U1B.3 | length 360
  Top Layer (.GTL) w10: C8B.2@3106.34,2007.32 R4B.2@3176.34,2007.32 3235.2,2066.18 3236.9,2066.18 ; Q10B.6@3170.34,2166.32 3170.34,2132.74 3236.9,2066.18 ; U1B.3@3273.54,2004.01 3264.83,2012.73 3264.83,2038.25 3236.9,2066.18
NetC8C_2: C8C.2 Q10C.6 R4C.2 U1C.3 | length 360
  Top Layer (.GTL) w10: C8C.2@4157.52,2007.32 R4C.2@4227.52,2007.32 4286.38,2066.18 4288.08,2066.18 ; Q10C.6@4221.52,2166.32 4221.52,2132.74 4288.08,2066.18 ; U1C.3@4324.72,2004.01 4316.01,2012.73 4316.01,2038.25 4288.08,2066.18
NetC8D_2: C8D.2 Q10D.6 R4D.2 U1D.3 | length 360
  Top Layer (.GTL) w10: C8D.2@5189.02,2007.32 R4D.2@5259.02,2007.32 5317.88,2066.18 5319.57,2066.18 ; Q10D.6@5253.02,2166.32 5253.02,2132.74 5319.57,2066.18 ; U1D.3@5356.22,2004.01 5347.5,2012.73 5347.5,2038.25 5319.57,2066.18
NetC9A_1: C9A.1 C10A.POS L1A.1 U5A.7 | length 412.7
  Top Layer (.GTL) w10: U5A.7@2303.79,1467.12 2305.58,1465.32 2411.09,1465.32 v1(2421.09,1455.32)
  MidLayer1 (.G1) w10: v1@2420.36,1455.05 2421.36,1455.05 v1@2420.36,1455.05
  Bottom Layer (.GBL) w10: L1A.1@2296.36,1324.05 2296.36,1374.05 C9A.1@2381.36,1459.05 2385.36,1455.05 2420.36,1455.05 2421.36,1455.05 2475.36,1455.05 C10A.POS@2491.36,1439.05
NetC9B_1: C9B.1 C10B.POS L1B.1 U5B.7 | length 412.7
  Top Layer (.GTL) w10: U5B.7@3351.03,1467.12 3352.83,1465.32 3458.34,1465.32 v1(3468.34,1455.32)
  MidLayer1 (.G1) w10: v1@3467.61,1455.05 3468.61,1455.05 v1@3467.61,1455.05
  Bottom Layer (.GBL) w10: L1B.1@3343.61,1324.05 3343.61,1374.05 C9B.1@3428.61,1459.05 3432.61,1455.05 3467.61,1455.05 3468.61,1455.05 3522.61,1455.05 C10B.POS@3538.61,1439.05
NetC9C_1: C9C.1 C10C.POS L1C.1 U5C.7 | length 412.7
  Top Layer (.GTL) w10: U5C.7@4402.21,1467.12 4404.01,1465.32 4509.52,1465.32 v1(4519.52,1455.32)
  MidLayer1 (.G1) w10: v1@4518.79,1455.05 4519.79,1455.05 v1@4518.79,1455.05
  Bottom Layer (.GBL) w10: L1C.1@4394.79,1324.05 4394.79,1374.05 C9C.1@4479.79,1459.05 4483.79,1455.05 4518.79,1455.05 4519.79,1455.05 4573.79,1455.05 C10C.POS@4589.79,1439.05